# EAGLE board PCB-SDCARD (EAGLE 6.5.0)
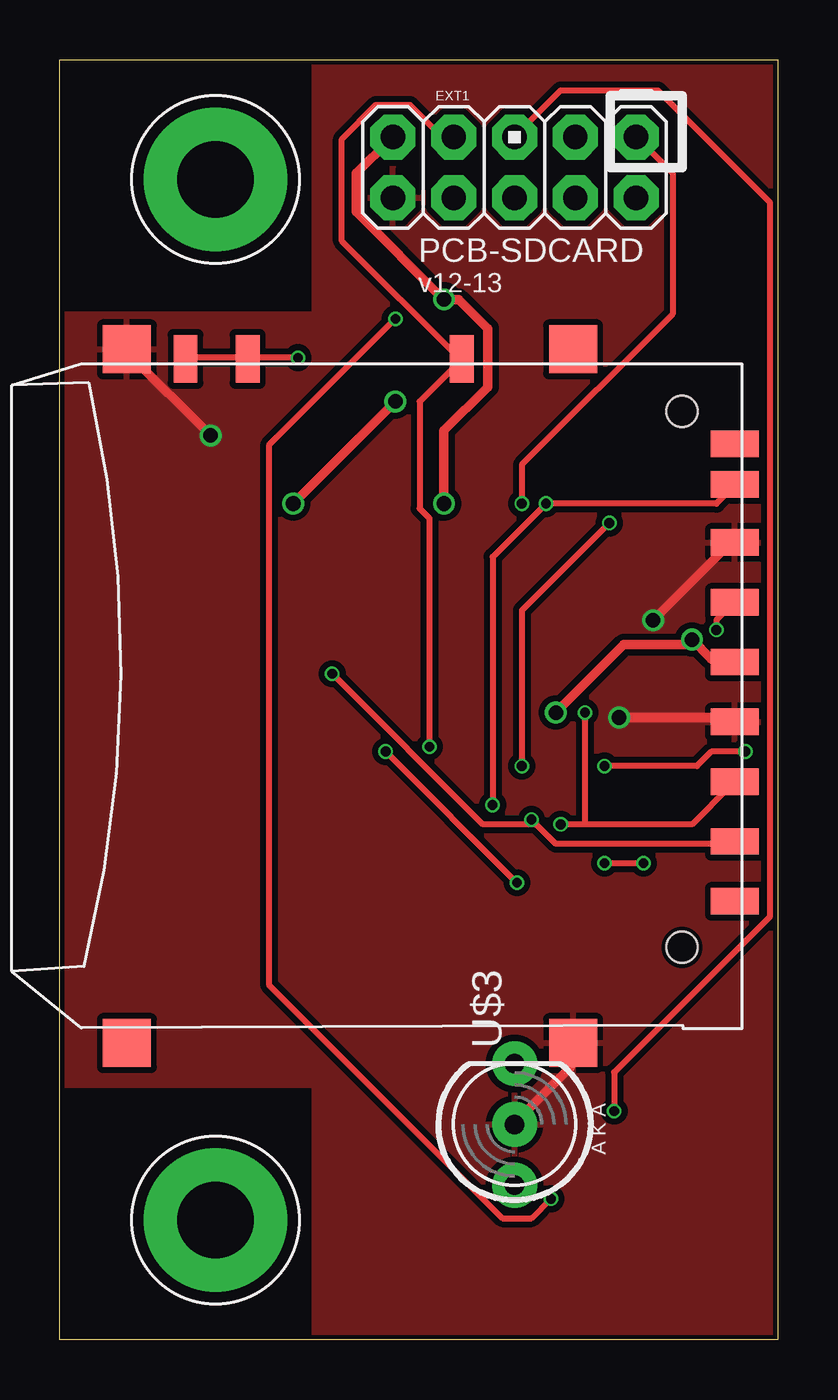
[diagram p0: board, top side]
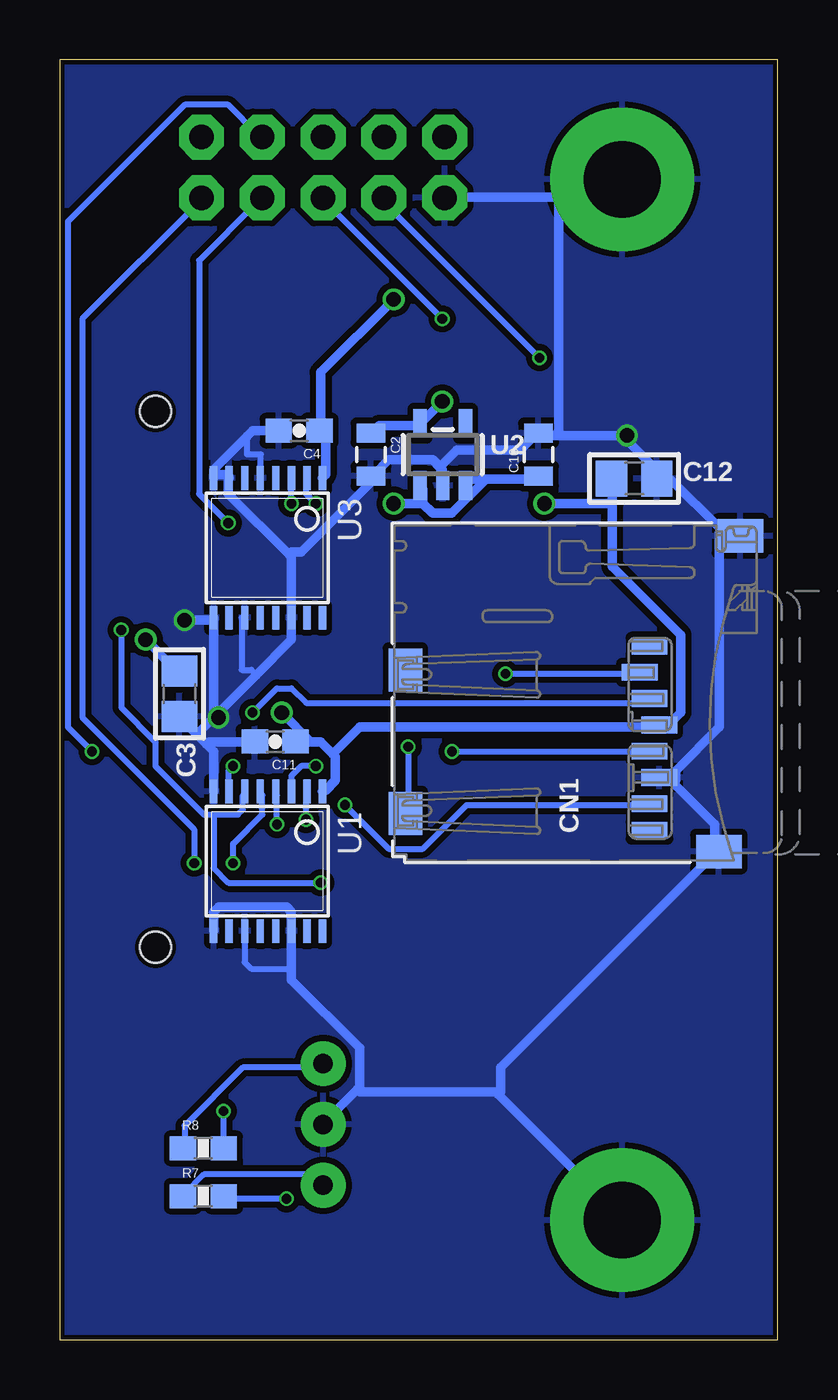
[diagram p1: board, bottom side, seen from below]

Size 30 x 53.5 mm. Coordinates in mm from the lower left corner, seen from the top.
Outline: 30,53.5 30,0 0,0 0,53.5 30,53.5
Copper layers (1*2*15*16): Top 0.035mm / dielectric 0.2mm / Route2 0.0175mm / dielectric 0.3mm / Route15 0.0175mm / dielectric 0.2mm / Bottom 0.035mm
Design rules "SeeedStudio_DRU-4layer_no_angle_20130527": minimum track width 4mil, minimum drill 0.2mm, track to track 6mil, track to pad 6mil, pad to pad 6mil, via to via 6mil, smd to smd 0mil, copper to edge 8mil, drill to drill 8mil, minimum pad ring 6mil, minimum via ring 4mil, stop-mask expansion 4mil, vias tented up to drill 100mil, thermal gap 10mil
Net classes: 0 default: width 0.254 mm, drill 0.406 mm, clearance 0.254 mm; 1 Power: width 0.406 mm, drill 0.61 mm, clearance 0.254 mm
tRestrict: area 0,0 to 10.5,10.5; area 0,43 to 10.5,53.5

## Footprints (pad centres in the part's own frame; a part is rotated, then mirrored left to right if it is on the bottom)
0805 = smd 0.8 x 1.2: 1 -0.9,0; 2 0.9,0
0805' = smd 1.3 x 1.5: 1 -0.95,0; 2 0.95,0
0603-CAP = smd 1.1 x 1: 1 -0.85,0; 2 0.85,0
MICROSD = smd 0.7 x 1.5: 1 9,-10.64; 2 7.9,-10.24; 3 6.8,-10.64; 4 5.7,-11.04; 5 4.6,-10.64; 6 3.5,-11.04; 7 2.4,-10.64; 8 1.3,-10.64 | smd 1.8 x 1.4: CD1 2,-0.44; CD2 8,-0.44 | smd 1.4 x 1.9: MT1 0.4,-13.54; MT2 13.6,-14.44
AVR_ICSP = drill 1.016 pad 1.88 octagon: 1 -1.27,5.08; 2 1.27,5.08; 3 -1.27,2.54; 4 1.27,2.54; 5 -1.27,0; 6 1.27,0; 7 -1.27,-2.54; 8 1.27,-2.54; 9 -1.27,-5.08; 10 1.27,-5.08
0603-RES = smd 1.1 x 1: 1 -0.85,0; 2 0.85,0
TSSOP16 = smd 0.305 x 0.991: 1 -3.575,-2.918; 2 -2.925,-2.918; 3 -2.275,-2.918; 4 -1.625,-2.918; 5 -0.975,-2.918; 6 -0.325,-2.918; 7 0.325,-2.918; 8 0.975,-2.918; 9 0.975,2.918; 10 0.325,2.918; 11 -0.325,2.918; 12 -0.975,2.918; 13 -1.625,2.918; 14 -2.275,2.918; 15 -2.925,2.918; 16 -3.575,2.918
SOT23-5 = smd 0.55 x 1.2: 1 -0.95,-1.3; 2 0,-1.3; 3 0.95,-1.3; 4 0.95,1.3; 5 -0.95,1.3
SD_LARGE = smd 1.1 x 2: 1 6.775,2.2; 2 4.275,2.2; 3 1.775,2.2; 4 -0.725,2.2; 5 -3.225,2.2; 6 -5.725,2.2; 7 -8.15,2.2; 8 -9.85,2.2; 9 9.275,2.2 | smd 2 x 1: CD -13.4,-9.2; WP -13.4,-18.15; WP1 -13.4,-20.75 | smd 2 x 2: GP -13.8,-23.2; GP2 15.2,-23.2; GP3 15.2,-4.55; GP4 -13.8,-4.55 | hole 1.3: -11.2,0; 11.2,0
LED5MM-BICOLOR = drill 0.813 pad 1.88: A2 2.54,0; A3 -2.54,0; K1 0,0
3.2MMPAD6MM = drill 3.2 pad 6: P$1 0,0

## Placement (x,y rotation side)
C2  10uF  [0805]  17,37 270 bottom
C3  10uF  [0805']  25,27 270 bottom
C4  0.1uF  [0603-CAP]  20,38 180 bottom
C10  10uF  [0805]  10,37 90 bottom
C11  0.1uF  [0603-CAP]  21,25 180 bottom
C12  10uF  [0805']  6,36 0 bottom
CN1  microSD  [MICROSD]  16,20 90 bottom
EXT1  M05X2PTH  [AVR_ICSP]  19,49 270 top
R7  270R  [0603-RES]  24,6 0 bottom
R8  270R  [0603-RES]  24,8 0 bottom
U1  74HC4050D  [TSSOP16]  22.6,20 180 bottom
U2  [SOT23-5]  14,37 0 bottom
U3  74HC4050D  [TSSOP16]  22.6,33.1 180 bottom
U$2  SD06132  [SD_LARGE]  26,27.6 270 top
U$3  LEDBICOLOR-AKA  [LED5MM-BICOLOR]  19,9 90 top
U$5  GNDPAD6MM  [3.2MMPAD6MM]  6.5,5 0 top
U$7  GNDPAD6MM  [3.2MMPAD6MM]  6.5,48.5 0 top

## Library data of the parts
C2 C4 C10 C11 EXT1 R7 R8 = SparkFun
C3 C12 CN1 U2 = microbuilder
U1 U3 U$2 U$3 U$5 U$7 = SKAARHOJ

## Nets
3.3V [Power]: C2.1 C3.1 C11.1 C12.1 CN1.4 U1.1 U2.5 U$2.4
5V [Power]: C4.1 C10.1 EXT1.9 U2.1 U2.3 U3.1
D22: EXT1.6 R7.2
D23: EXT1.5 R8.2
GND [Power]: C2.2 C3.2 C4.2 C10.2 C11.2 C12.2 CN1.6 CN1.MT1 CN1.MT2 EXT1.10 U1.8 U1.9 U1.11 U1.14 U2.2 U3.5 U3.7 U3.8 U3.9 U3.11 U3.14 U$2.3 U$2.6 U$2.GP U$2.GP3 U$3.K1 U$5.P$1 U$7.P$1
MOSI/DATA1: CN1.3 U1.4 U$2.2
N$17: R8.1 U$3.A2
N$22: R7.1 U$3.A3
SCK/DATA0: CN1.5 U1.6 U$2.5
SD_CD: CN1.CD1 EXT1.7 U$2.CD
SD_CS: CN1.2 U1.2 U$2.1
SD_CS5V: EXT1.4 U1.3
SD_DOUT: CN1.7 U3.3 U$2.7
SPI_MISO: EXT1.1 U3.2
SPI_MOSI: EXT1.2 U1.5
SPI_SCLK: EXT1.3 U1.7
WP: EXT1.8 U$2.WP U$2.WP1

## Tracks (layer width: path | path; a pad name or v marks a point on that pad's centre or on a via)
3.3V  (via drill 0.61)
  Top 0.406: U$2.4 28.04,28.45 27.23,28.45 v26.42,29.26 26.42,29.06 23.57,29.06 v20.73,26.21 | v9.75,34.95 v14.02,39.22
  Bottom 0.406: v26.42,29.26 25.2,28.04 C3.1 | C2.1 16.87,38 16.66,38.2 15.04,38.2 U2.5 14.83,38.41 v14.02,39.22 | 18.59,24.49 19.1,24.99 19.51,24.99 | 18.59,24.49 18.49,24.38 18.49,23.37 18.9,22.96 U1.1 | 19.51,24.99 20.12,24.99 C11.1 | 18.59,24.49 17.48,25.6 5.08,25.6 CN1.4 4.88,25.81 4.47,25.81 4.06,26.21 4.06,29.46 6.91,32.31 6.91,34.95 | 6.91,34.95 6.91,35.97 C12.1 | 6.91,34.95 v9.75,34.95 | 19.51,24.99 v20.73,26.21
5V  (via drill 0.61)
  Top 0.406: EXT1.9 13.82,50.19 12.39,48.77 12.39,47.14 v16.05,43.48 16.66,43.48 17.88,42.27 17.88,39.83 16.05,38 v16.05,34.95
  Bottom 0.406: 12.19,35.97 12.8,35.97 13.01,35.76 U2.3 | 12.19,35.97 10.16,35.97 C10.1 | 14.83,34.95 14.83,35.56 U2.1 | 14.83,34.95 14.43,34.54 13.61,34.54 12.19,35.97 | U3.1 18.9,36.17 18.9,37.8 19.1,38 C4.1 19.1,38.2 19.1,40.44 v16.05,43.48 | v16.05,34.95 14.83,34.95
D22  (via drill 0.41)
  Top 0.254: v20.52,5.89 19.71,5.08 18.49,5.08 8.74,14.83 8.74,37.39 v14.02,42.67
  Bottom 0.254: v20.52,5.89 22.96,5.89 R7.2 | v14.02,42.67 18.9,47.55 EXT1.6
D23  (via drill 0.41)
  Top 0.254: v23.16,9.55 23.16,11.18 29.67,17.68 29.67,47.55 24.99,52.22 20.93,52.22 19.1,50.39 EXT1.5
  Bottom 0.254: v23.16,9.55 23.16,8.13 R8.2
GND  (via drill 0.61)
  Top 0.406: U$2.GP3 21.34,12.39 21.34,11.38 19.1,9.14 U$3.K1 | v23.37,26.01 28.04,26.01 U$2.3 | v24.79,30.07 28.04,33.33 U$2.6 | v6.3,37.8 2.85,41.25 U$2.GP
  Bottom 0.254: U3.5 21.6,36.02 21.6,37 22.17,37 22.17,37.77 | U3.11 22.4,30.18 22.4,28 22,28 21.79,27.79 | U1.11 22.27,15.78 22,15.5 20.42,15.5 20.32,15.4
  Bottom 0.406: U1.9 23.57,17.27 23.57,17.88 23.37,18.09 20.52,18.09 20.32,17.88 20.32,17.27 U1.14 20.32,17.07 20.32,15.4 20.32,15.04 17.48,12.19 17.48,10.57 17.58,10.46 | 17.58,10.46 18.9,9.14 U$3.K1 | 11.68,10.26 6.5,5.08 U$5.P$1 | 11.68,10.26 11.79,10.36 17.48,10.36 17.58,10.46 | 9.14,47.75 7.11,47.75 6.5,48.36 U$7.P$1 9.14,47.75 | 9.14,47.75 13.82,47.75 EXT1.10 | C4.2 20.93,38 21.95,38 22.17,37.77 23.57,36.37 U3.8 23.57,36.17 22.96,36.17 U3.7 22.96,35.97 22.96,35.36 20.42,32.82 | 24.28,25.3 24.99,26.01 C3.2 | 24.28,25.3 23.88,24.89 | 23.88,24.89 23.57,24.59 23.57,22.96 U1.8 | 24.28,25.3 23.47,26.11 | 23.47,26.11 21.79,27.79 20.32,29.26 20.32,30.07 U3.14 20.32,30.28 20.32,32.72 20.42,32.82 | 23.57,30.08 23.57,30.07 23.57,26.21 23.47,26.11 | 23.57,30.08 U3.9 | C11.2 21.95,24.99 23.77,24.99 23.88,24.89 | v23.37,26.01 23.47,26.11 | v24.79,30.07 23.77,30.07 23.57,30.08 | 5.08,23.57 CN1.6 | CN1.6 4.88,23.37 4.47,23.37 2.64,21.54 2.64,20.52 CN1.MT1 | 2.44,20.52 CN1.MT1 | 14.12,36.47 14.43,36.78 16.26,36.78 16.87,36.17 C2.2 16.87,35.97 19.91,32.92 20.32,32.92 20.42,32.82 | 14.12,36.47 14.02,36.37 14.02,35.76 U2.2 | 1.63,33.73 CN1.MT2 | 9.14,37.8 6.5,37.8 6.4,37.69 | 9.14,37.8 9.96,37.8 C10.2 10.16,37.8 10.77,37.19 13.41,37.19 14.12,36.47 | 6.4,37.69 4.88,36.17 C12.2 4.67,36.17 2.23,33.73 1.83,33.73 CN1.MT2 | v6.3,37.8 6.4,37.69 | CN1.6 4.27,23.37 4.27,23.77 2.44,25.6 2.44,33.73 CN1.MT2 | 9.14,37.8 9.14,47.75 | 11.68,10.26 11.58,10.36 11.58,11.38 2.64,20.32 CN1.MT1
  pour Top: 0,0 30,0 30,54 0,54
  pour Bottom: 0,0 30,0 30,54 0,54
MOSI/DATA1  (via drill 0.41)
  Top 0.254: 21.95,21.54 26.42,21.54 28.04,23.16 U$2.2 | 21.95,21.54 v20.93,21.54 | 21.95,21.54 v21.95,26.21
  Bottom 0.254: v20.93,21.54 20.93,22.76 U1.4 | v21.95,26.21 20.93,27.23 20.32,27.23 19.71,26.62 5.49,26.62 CN1.3
N$17
  Bottom 0.254: R8.1 24.79,8.13 24.79,8.94 22.35,11.38 19.1,11.38 U$3.A2
N$22
  Bottom 0.254: R7.1 24.79,6.1 23.98,6.91 19.51,6.91 19.1,6.5 U$3.A3
SCK/DATA0  (via drill 0.41)
  Top 0.254: v27.43,29.67 27.43,30.07 28.04,30.68 U$2.5 | v19.1,19.1 v13.61,24.59
  Bottom 0.254: 23.57,21.95 23.98,21.95 26.01,23.98 26.01,24.99 27.43,26.42 v27.43,29.67 | 23.57,21.95 22.55,21.95 22.35,22.15 22.35,22.76 U1.6 | v13.61,24.59 5.49,24.59 CN1.5 | v19.1,19.1 22.96,19.1 23.57,19.71 23.57,21.95
SD_CD  (via drill 0.41)
  Top 0.254: v15.44,24.79 15.44,34.34 15.04,34.75 15.04,39.22 16.66,40.84 U$2.CD 16.66,41.05 11.79,45.92 11.79,50.19 13.21,51.61 14.63,51.61 15.85,50.39 16.46,50.39 EXT1.7
  Bottom 0.254: v15.44,24.79 15.44,22.15 CN1.CD1
SD_CS  (via drill 0.41)
  Top 0.254: 19.91,21.54 20.73,20.73 28.04,20.73 U$2.1 | v11.38,27.84 17.68,21.54 19.91,21.54 | 19.91,21.54 v19.71,21.74
  Bottom 0.254: v19.71,21.74 19.71,22.76 U1.2 | v11.38,27.84 5.89,27.84 CN1.2
SD_CS5V  (via drill 0.41)
  Top 0.254: v19.3,23.98 19.3,30.48 v22.96,34.14
  Bottom 0.254: v19.3,23.98 19.91,23.98 20.32,23.57 20.32,22.96 U1.3 | v22.96,34.14 24.18,35.36 24.18,45.11 21.74,47.55 EXT1.4
SD_DOUT  (via drill 0.41)
  Top 0.254: U$2.7 28.04,35.56 27.43,34.95 v20.32,34.95 18.09,32.72 v18.09,22.35
  Bottom 0.254: v20.32,34.95 20.32,35.97 U3.3 | v18.09,22.35 16.26,20.52 14.83,20.52 13.01,22.35 5.49,22.35 CN1.7
SPI_MISO  (via drill 0.41)
  Top 0.254: v19.3,34.95 19.3,36.58 25.6,42.88 25.6,48.77 24.18,50.19 EXT1.1
  Bottom 0.254: v19.3,34.95 19.71,35.36 19.71,35.97 U3.2
SPI_MOSI  (via drill 0.41)
  Top 0.254: v24.38,19.91 v22.76,19.91
  Bottom 0.254: v22.76,19.91 22.76,20.73 21.54,21.95 21.54,22.76 U1.5 | v24.38,19.91 24.38,21.34 29.06,26.01 29.06,42.67 24.18,47.55 EXT1.2
SPI_SCLK  (via drill 0.41)
  Top 0.254: v22.76,23.98 26.62,23.98 27.23,24.59 v28.65,24.59
  Bottom 0.254: v22.76,23.98 22.96,23.77 22.96,22.96 U1.7 | v28.65,24.59 29.67,25.6 29.67,46.74 24.79,51.61 22.96,51.61 21.74,50.39 EXT1.3
WP  (via drill 0.41)
  Top 0.254: U$2.WP1 5.28,41.05 7.72,41.05 U$2.WP 7.92,41.05 v9.96,41.05
  Bottom 0.254: v9.96,41.05 16.46,47.55 EXT1.8

## Text on the board
_tsilk: PCB-SDCARD | v12-13